# Altium PCB IMU_EEPROM.PcbDoc
Units mm, origin at the board's own origin, x right, y up, seen from the top; angles counter-clockwise.
Board outline 95 x 95 mm, 2 copper layers (Top Layer, Bottom Layer); 22 components, 15 nets, 70 pads, 31 vias.
Unrouted connection lines stored in the file: 41.
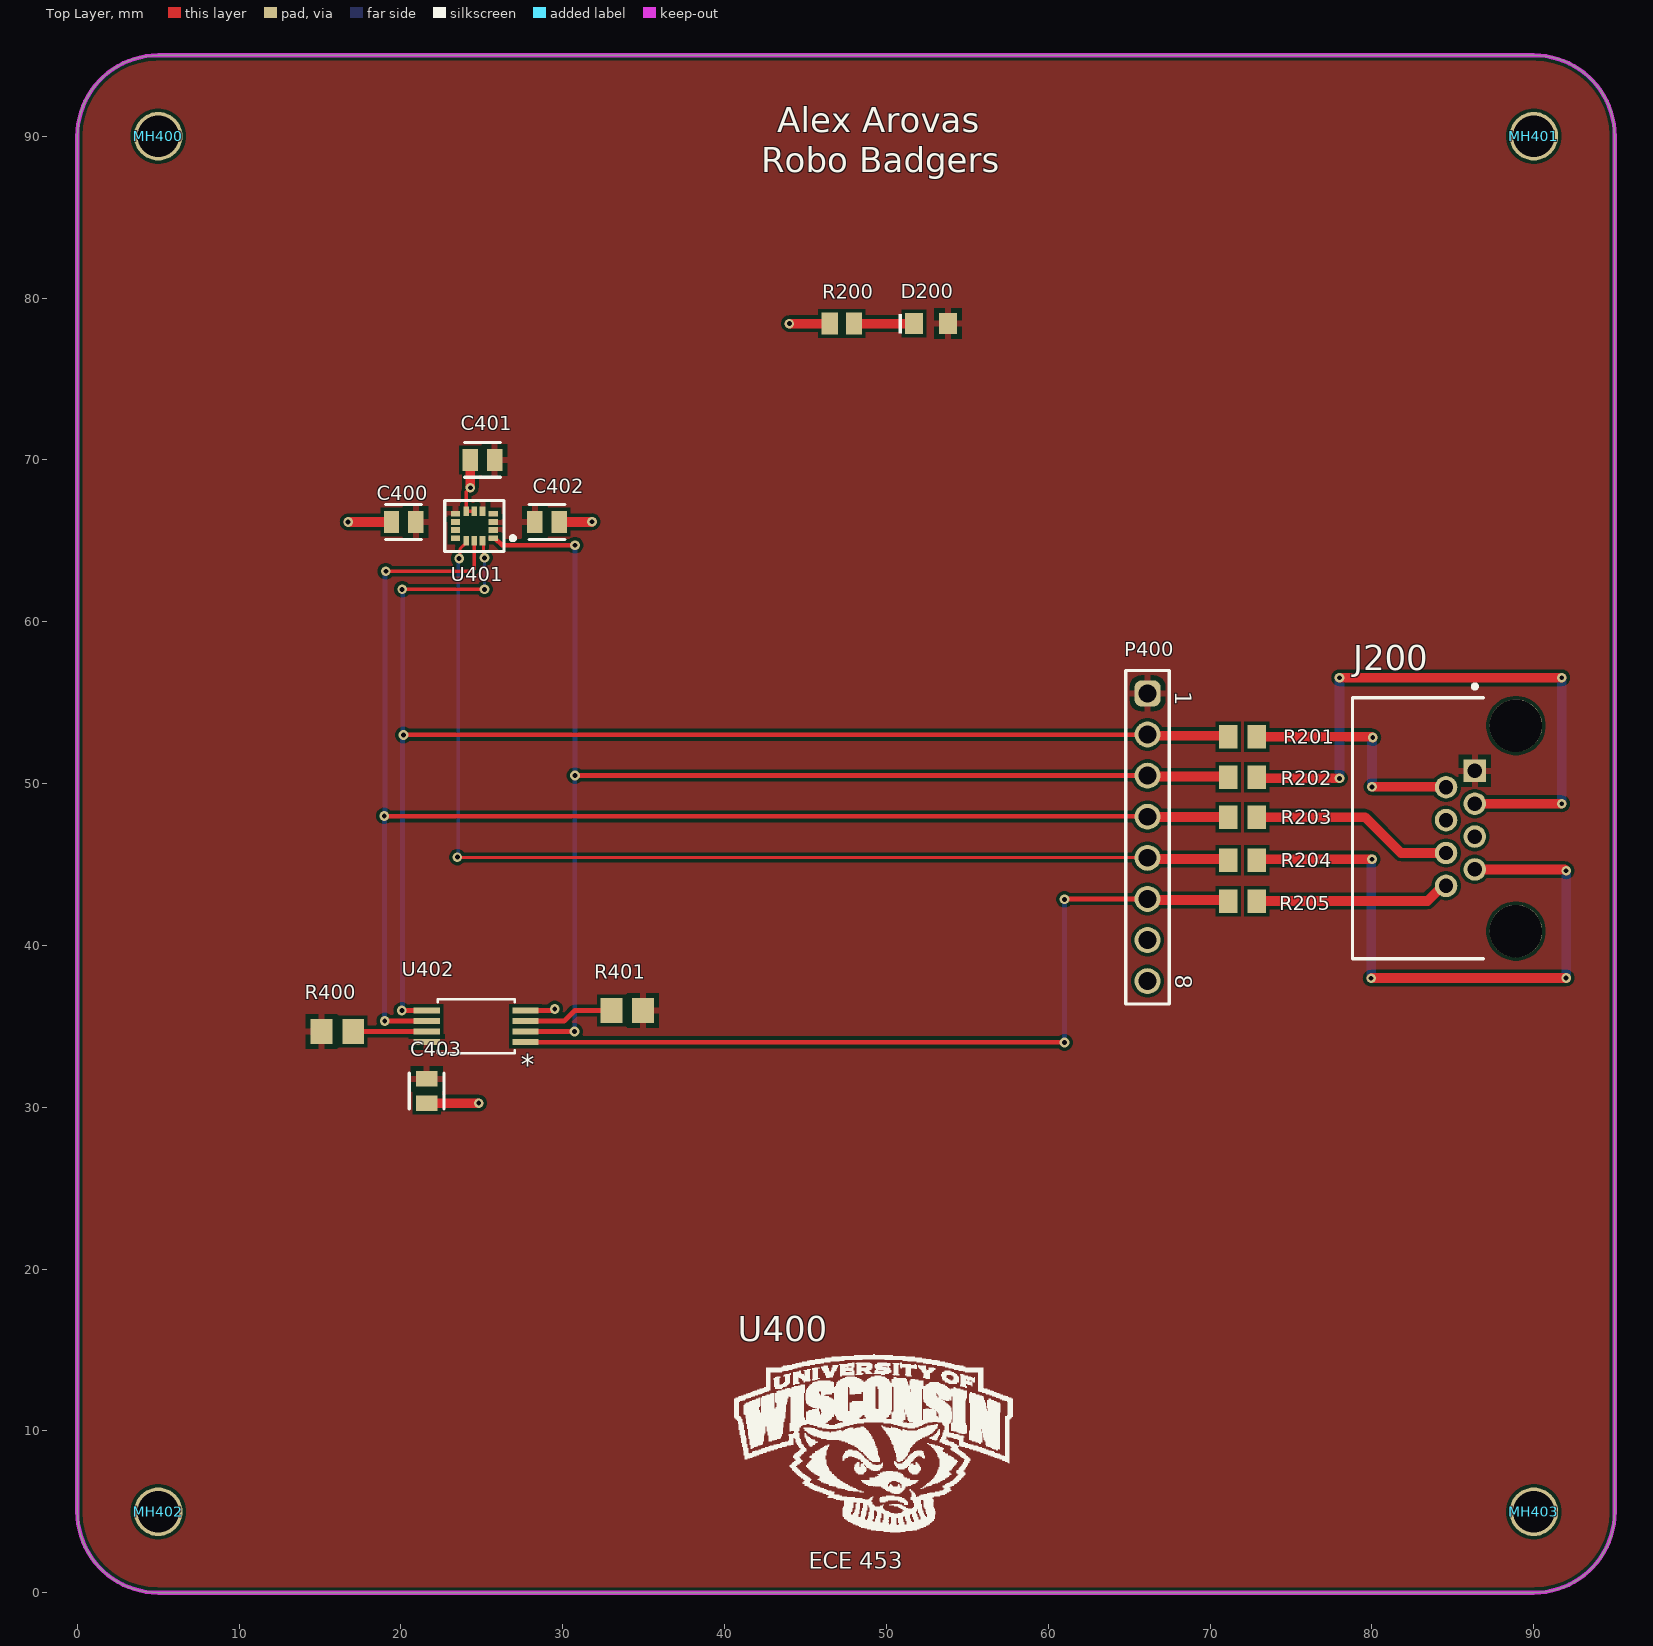
[diagram p0: Top Layer view]
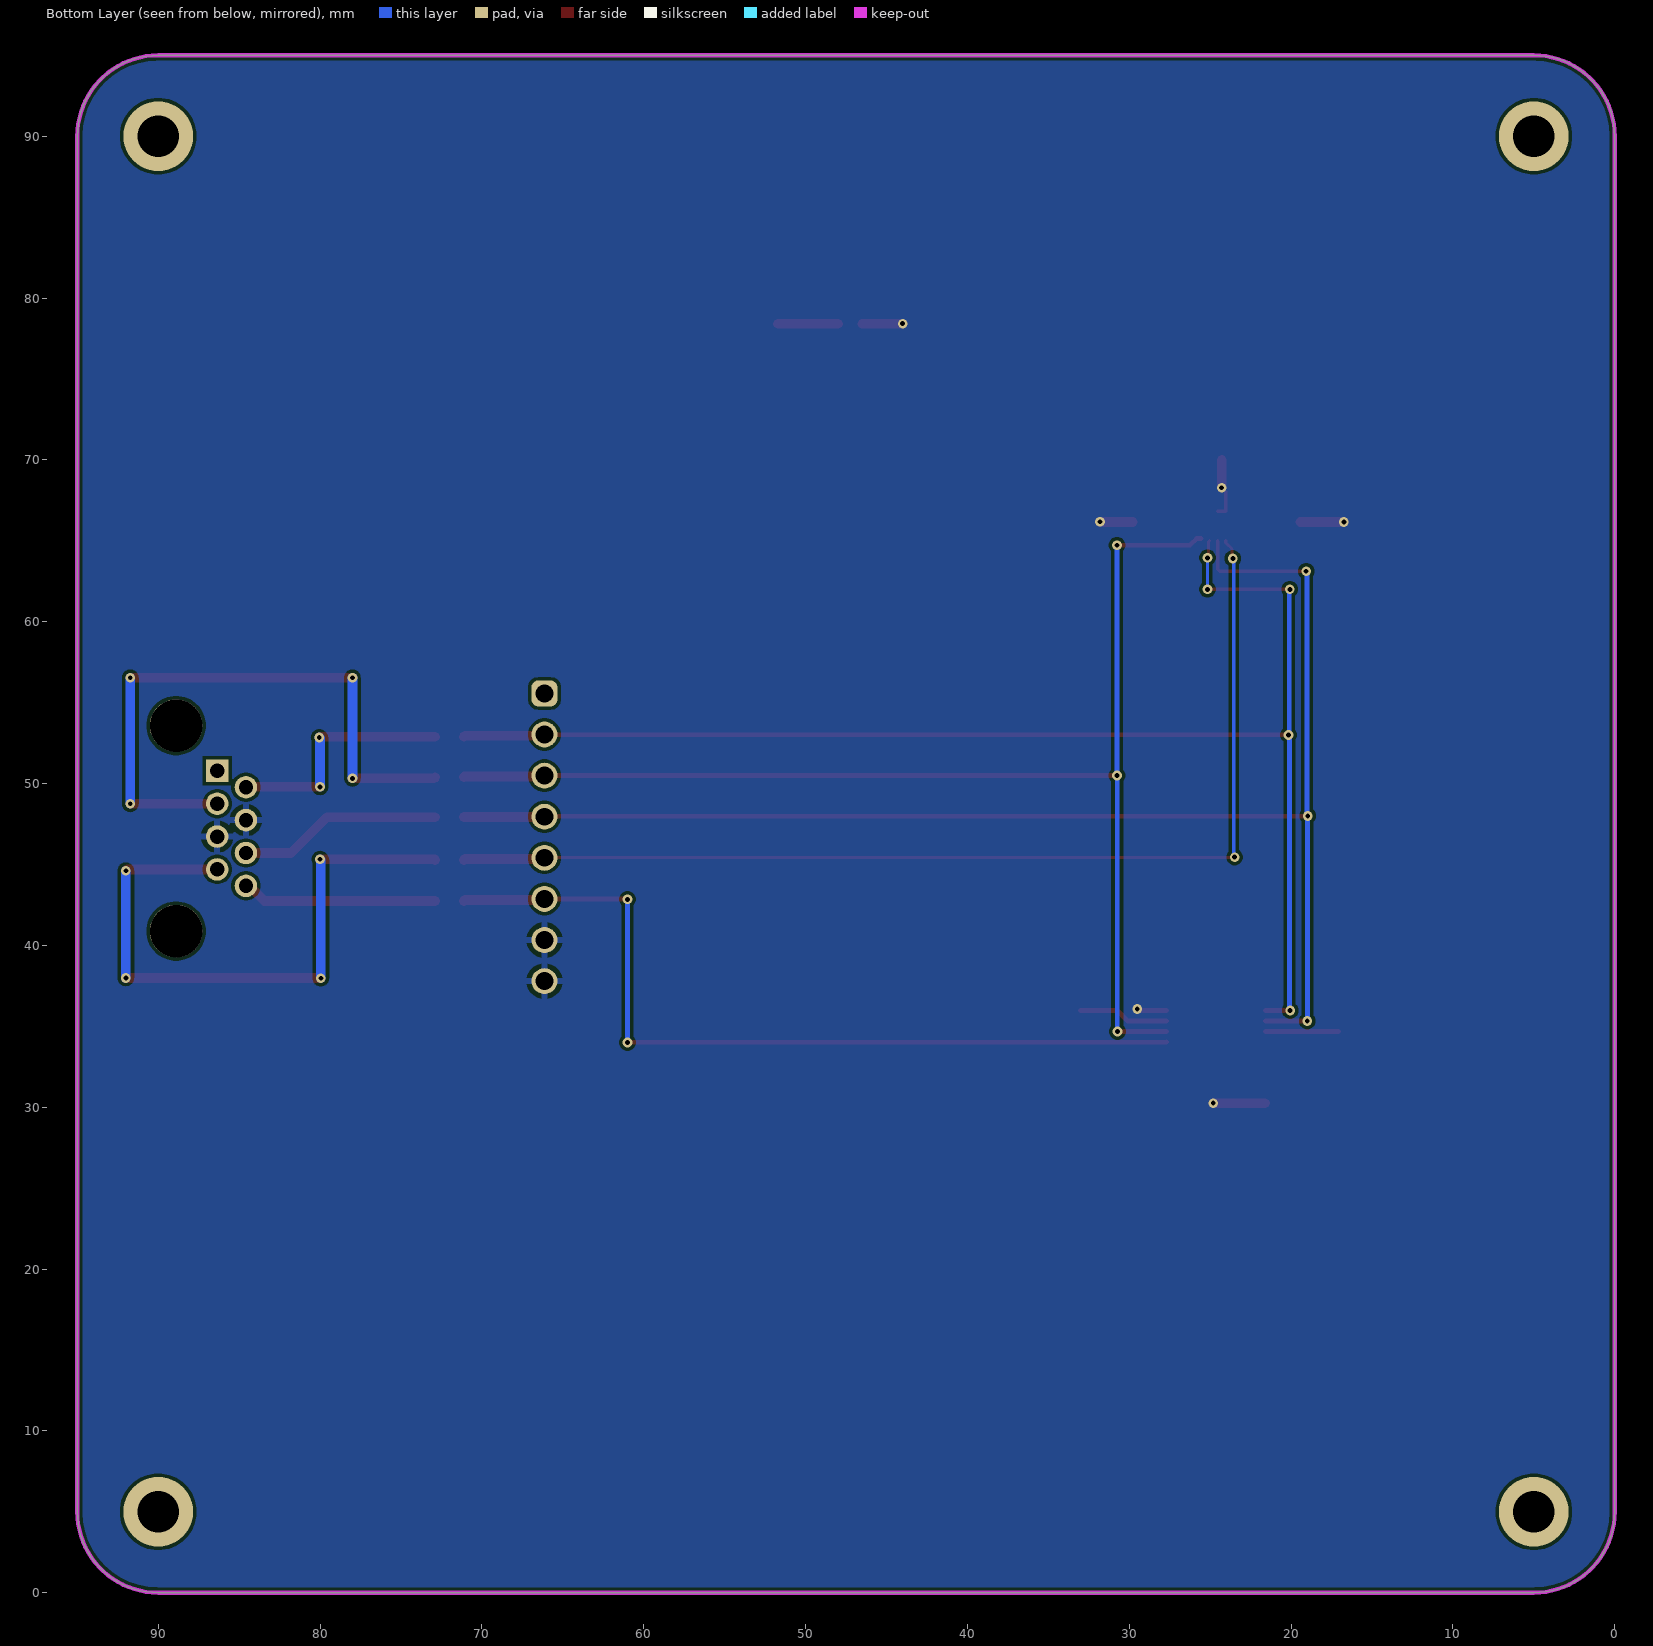
[diagram p1: Bottom Layer view, seen from below]
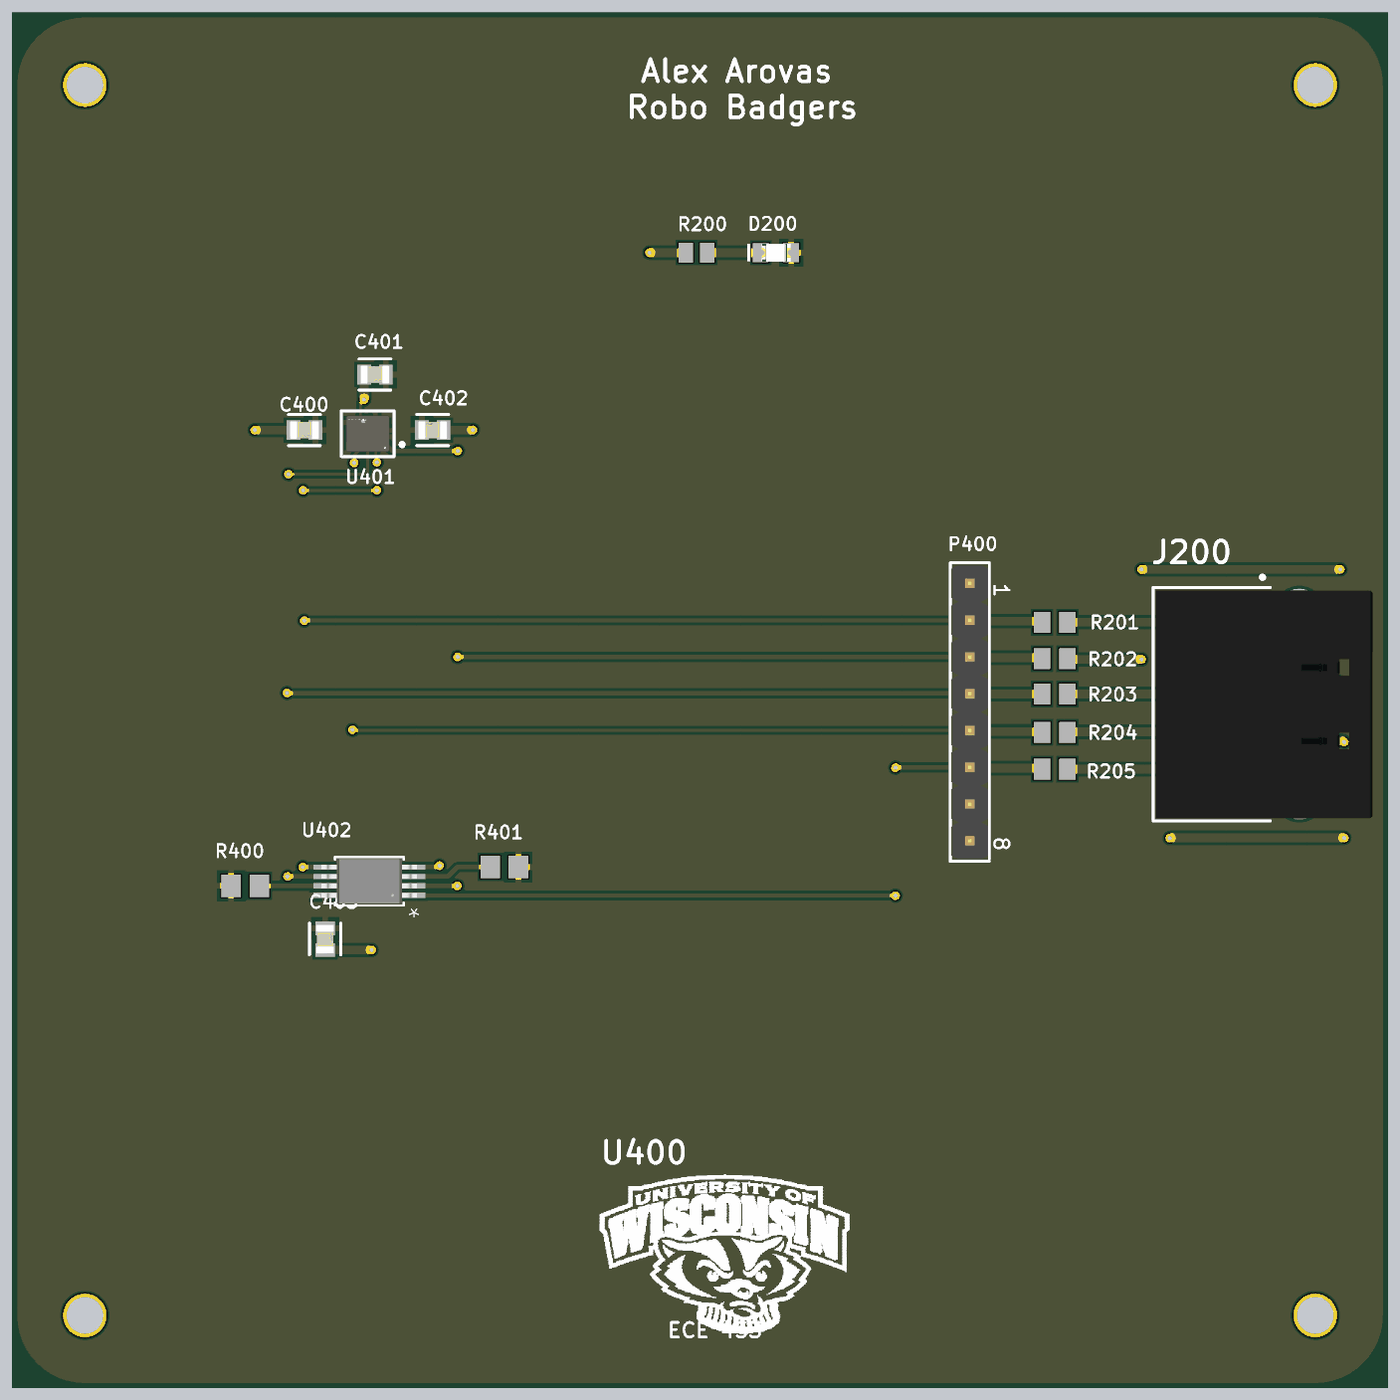
[diagram p2: 3D render of the assembled board from above, using the file's embedded part models]

## Layer stack, top to bottom
Top Solder: solder mask 0.0102, Solder Resist, Dk 3.5
Top Layer: signal copper 0.0356
Dielectric1: dielectric 0.32, FR-4, Dk 4.8
Bottom Layer: signal copper 0.0356
Bottom Solder: solder mask 0.0102, Solder Resist, Dk 3.5

## Board outline
0,5 ccw(c5,5) 5,0 90,0 ccw(c90,5) 95,5 95,90 ccw(c90,90) 90,95 5,95 ccw(c5,90) 0,90

## Design rules (kind name [scope] priority, off if disabled: settings)
Clearance Polygon_Clearance [All vs InPolygon] p1: gap=0.2 ignorepadtopadclearanceinfootprint=FALSE
Clearance [All] p2: gap=0.2 ignorepadtopadclearanceinfootprint=TRUE
ComponentClearance [InComponent('U3')] p1: gap=0 collisioncheckmode=3 verticalgap=0.254 showdistances=FALSE
Height [All] p1: minheight=0 maxheight=75 prefheight=12.7
HoleSize [All] p1: absolutevalues=TRUE maxlimit=6.35 minlimit=0.3 maxpercent=80.000 minpercent=20.000
MinimumAnnularRing [All] p1: minimumring=0.15
MinimumSolderMaskSliver [All] p1: minsoldermaskwidth=0.22
NetAntennae NetAntennae_5.0V [InNet('5.0V')] p1: netantennaetolerance=0
NetAntennae NetAntennae_3.3V [InNet('3.3V')] p2: netantennaetolerance=0
PlaneClearance [All] p1: clearance=0.3
PlaneConnect [All] p1: planeconnectstyle=Relief reliefexpansion=0.3 reliefentries=4 reliefconductorwidth=0.3 reliefairgap=0.3
PolygonConnect ViaConnect [All vs IsVia] p1: connectstyle=Direct reliefconductorwidth=0.381 reliefentries=4 polygonreliefangle="90 Angle" airgapwidth=0.254
PolygonConnect [All] p2: connectstyle=Relief reliefconductorwidth=0.4 reliefentries=4 polygonreliefangle="90 Angle" airgapwidth=0.3
RoutingVias [All] p1: holewidth=0.3 width=0.6 viastyle="Through Hole" minholewidth=0.3 minwidth=0.6 maxholewidth=5 maxwidth=10
SilkToSilkClearance [All] p1: silktosilkclearance=0
SilkToSolderMaskClearance [IsPad] p1: minsilkscreentomaskgap=0 clearancetoexposedcopper=TRUE
SolderMaskExpansion [All] p1: expansion=0.102 istentingtop=FALSE
UnConnectedPin [All] p1:
Width [All] p1: maxlimit=10 minlimit=0.2 preferedwidth=0.6
21 further rules are at their usual default settings.

## Classes and differential pairs
component class 04_Mechanical: C400 C401 C402 C403 MH400 MH401 MH402 MH403 P400 R400 R401 U1 U400 U401 U402

## Components (designator, comment, footprint, x,y, rotation, side; value= is the part's Value field where it differs from the comment)
C400 "0.10 μF" FP-C0805C-DN-MFG 20.165,66.162 r180 top
C401 "0.10 μF" FP-C0805C-DN-MFG 25.037,70 r180 top
C402 "0.10 μF" FP-C0805C-DN-MFG 29.025,66.162 r0 top
C403 "0.10 μF" FP-C0805C-DN-MFG 21.593,31 r270 top
D200 "150080GS75000" WL-SMCW_0805_150080xx75000 52.75,78.42 r0 top
J200 "RJHSE-5080" FP-RJHSE-5080-MFG 86.482,47.232 r90 top
MH400 "MHOLE_2_55MM" MHOLE_2_55MM 5,90 r0 top
MH401 "MHOLE_2_55MM" MHOLE_2_55MM 90,90 r0 top
MH402 "MHOLE_2_55MM" MHOLE_2_55MM 5,5 r0 top locked
MH403 "MHOLE_2_55MM" MHOLE_2_55MM 90,5 r0 top
P400 "61300811121" 61300811121 66.132,46.681 r270 top
R200 "330R" RESC2013X60X40LL20T25 47.25,78.42 r180 top
R201 "0R" RESC2013X70X40NL20T20 72,52.892 r180 top
R202 "0R" RESC2013X70X40NL20T20 72,50.382 r180 top
R203 "0R" RESC2013X70X40NL20T20 72,47.922 r180 top
R204 "0R" RESC2013X70X40NL20T20 72,45.272 r180 top
R205 "0R" RESC2013X70X40NL20T20 72,42.739 r180 top
R400 "10kR" RESC2013X70X40ML20T20 16.075,34.675 r180 top
R401 "10kR" RESC2013X70X40ML20T20 33.975,35.975 r0 top
U400 "Bucky" WalkingBucky 48,2 r0 top
U401 "LSM6DSMTR" FP-LGA-14L-DM00249496-MFG 24.537,65.912 r180 top
U402 "M95512-DWDW4TP/K" TSSOP8_169MILS_DW_STM-M 24.647,35 r180 top

## Footprints (in the part's own frame and the unit in brackets; to place one, negate y for a bottom-side part, rotate by r counter-clockwise, add the part's x,y. Pads: shape width x height; smd on the part's side, far side on the other; paste and mask are expansions set on the pad)
61300811121 [mm] "Pin Header, pitch 2.54 mm, THT, Vertical, single row, 8p"
  rrect50% 1.6x1.6 hole 1.1: 1(-8.89,0)
  round 1.6 hole 1.1: 2(-6.35,0) 3(-3.81,0) 4(-1.27,0) 5(1.27,0) 6(3.81,0) 7(6.35,0) 8(8.89,0)
  silkscreen extent -10.31,-1.35 10.31,1.35, body extent -10.16,-1.27 10.16,1.27, height 8.57
FP-C0805C-DN-MFG [mm]
  rect 0.95x1.35 smd paste+0 mask+0: 1(-0.75,0) 2(0.75,0)
  silkscreen extent -1.1,-1.07 1.1,1.07, body extent -1.4,-0.85 1.4,0.85, height 0.25
FP-LGA-14L-DM00249496-MFG [mm]
  rect 0.575x0.35 smd paste+0 mask+0: 1(-1.162,0.75) 2(-1.162,0.25) 3(-1.162,-0.25) 4(-1.162,-0.75) 8(1.162,-0.75) 9(1.162,-0.25) 10(1.162,0.25) 11(1.162,0.75)
  rect 0.35x0.575 smd paste+0 mask+0: 5(-0.5,-0.913) 6(0,-0.913) 7(0.5,-0.913) 12(0.5,0.913) 13(0,0.913) 14(-0.5,0.913)
  silkscreen extent -2.5,-1.58 1.83,1.58, body extent -2.05,-1.8 2.05,1.8, height 0.25
FP-RJHSE-5080-MFG [mm]
  rect 1.39x1.39 hole 0.89 paste-1000 mask+0: 1(3.556,0.127)
  round 1.39 hole 0.89 paste-1000 mask+0: 2(2.54,1.905) 3(1.524,0.127) 4(0.508,1.905) 5(-0.508,0.127) 6(-1.524,1.905) 7(-2.54,0.127) 8(-3.556,1.905)
  round 3.25 hole 3.25 unplated paste-1000 mask+0: ""(-6.35,-2.413) ""(6.35,-2.413)
  silkscreen extent -8.06,-0.41 8.89,7.68, body extent -8.16,-7.78 8.16,7.78, height 0.25
MHOLE_2_55MM [mm]
  round 3 / inner round 4.572 / far side round 4.318 hole 2.55: 1(0,0)
RESC2013X60X40LL20T25 [mm] "Chip Resistor, 2-Leads, Body 2.00x1.25mm, IPC High Density"
  rect 1x1.35 smd: 1(-0.75,0) 2(0.75,0)
  body extent -1.1,-0.72 1.1,0.72, height 0.6
RESC2013X70X40ML20T20 [mm] "Chip Resistor, 2-Leads, Body 2.00x1.25mm, IPC Low Density"
  rect 1.35x1.55 smd: 1(-0.975,0) 2(0.975,0)
  body extent -1.1,-0.72 1.1,0.72, height 0.7
RESC2013X70X40NL20T20 [mm] "Chip Resistor, 2-Leads, Body 2.00x1.25mm, IPC Medium Density"
  rect 1.15x1.45 smd: 1(-0.875,0) 2(0.875,0)
  body extent -1.1,-0.72 1.1,0.72, height 0.7
TSSOP8_169MILS_DW_STM-M [mil]
  rect 63.5x14 smd paste+0 mask+0: 1(-120.25,38.39) 2(-120.25,12.8) 3(-120.25,-12.8) 4(-120.25,-38.39) 5(120.25,-38.39) 6(120.25,-12.8) 7(120.25,12.8) 8(120.25,38.39)
  silkscreen extent -94,-66 94,66, body extent -130,-61 130,61, height 47
WalkingBucky [mm]
  silkscreen extent -7.42,1.75 9.8,12.73
WL-SMCW_0805_150080xx75000 [mm] "SMD Mono-color Chip LED, body 2.0x1.25mm"
  rect 1.1x1.3 smd: 1(-1.05,0) 2(1.05,0)
  silkscreen extent -2,-0.6 -1.8,0.6, body extent -1,-0.63 1,0.62, height 0.7

## Part data
C400 C401 C402 C403: library part CMP-2007-00279-2, "CAP CER 0.1UF 50V X7R 0805", Case Code (Imperial)=0805, Case Code (Metric)=2012, Dielectric=X7R, Manufacturer=KEMET, Manufacturer Part Number=C0805C104K5RACTU, Max Operating Temperature=125°C, Min Operating Temperature=-55°C, Package=C0805C-DN, Package Quantity=4000, Supplier Part Number=399-C0805C104K5RAC7800CT-ND, Temperature="-55°C to +125°C", Temperature Coefficient=30ppm/°C, Temperature Range High=+125°C, Tolerance=0.1, Voltage=500V, Voltage Rating="50 V", Voltage Rating (DC)=50V, Automotive=No, Capacitance="0.10 μF", Case/Package=0805, Category=Cap, ComponentLink1Description=https://datasheet.ciiva.com/32431/slceramic-chip-condensers-e-32431755.pdf?src-supplier=Distrelec, ComponentLink1URL=https://datasheet.ciiva.com/32431/slceramic-chip-condensers-e-32431755.pdf?src-supplier=Distrelec, ComponentLink2Description=Datasheet, ComponentLink2URL=https://content.kemet.com/datasheets/KEM_C1003_C0G_SMD.pdf, ComponentLink3Description=https://datasheet.ciiva.com/28682/1851736-28682232.pdf?src-supplier=Element14, ComponentLink3URL=https://datasheet.ciiva.com/28682/1851736-28682232.pdf?src-supplier=Element14, ComponentLink4Description=https://datasheet.ciiva.com/18410/70095383-18410815.pdf?src-supplier=Allied+Electronics, ComponentLink4URL=https://datasheet.ciiva.com/18410/70095383-18410815.pdf?src-supplier=Allied+Electronics, ComponentLink5Description=https://datasheet.ciiva.com/14589/70095383-14589048.pdf?src-supplier=Allied+Electronics, ComponentLink5URL=https://datasheet.ciiva.com/14589/70095383-14589048.pdf?src-supplier=Allied+Electronics, Construction=Flat, Depth=1.25mm, Device Class L1="Passive Components", Device Class L2=Capacitors, Device Class L3="Ceramic Capacitors", Digikey Description="CAP CER 0.1UF 50V X7R 0805", Height=0.88mm, Ipc Land Pattern Name=CAPC200125X78, Lead Free=Yes, Lead Pitch=0.75mm, Length=2mm, Material=Ceramic, Mounting Technology="Surface Mount,PCB", Mouser Description="Cap Ceramic 0.1uF 50V X7R 10% SMD 2.0 x 1.2 mm 125 C Paper T/R", Octopart=https://octopart.com/c0805c104k5ractu-kemet-143926, Packaging="Tape and Reel", Pins=2, Pricing="1=0.14, 10=0.091, 50=0.0546, 100=0.043, 500=0.03172, 1000=0.02627 (USD)", Radiation Hardening=No, Reach SVHC Compliant=No, RoHS=TRUE, RoHS Compliant=Yes, Series="SMD Comm X7R", Stock=1813524, Supplier=Digikey, Temperature Characteristic=X7R, Temperature Range Low=-55°C, Termination=SMD/SMT, Width=1.2mm
D200: library part CMP-1426-00007-2, Case Code (Imperial)=0805, Case Code (Metric)=2012, Color=Green, Forward Current=100mA, Forward Voltage=3.2V, Lens Color=Colorless, Manufacturer="Wurth Electronics", Max Junction Temperature (Tj)=95°C, Max Operating Temperature=85°C, Max Reverse Voltage (DC)=5V, Min Operating Temperature=-40°C, Package Quantity=1, Power Dissipation=105mW, Supplier Part Number=732-4983-1-ND, Test Current=20mA, Case/Package=0805, Category=LEDs, ComponentLink1Description=https://datasheet.ciiva.com/29563/150080gs75000-29563008.pdf?src-supplier=Digikey, ComponentLink1URL=https://datasheet.ciiva.com/29563/150080gs75000-29563008.pdf?src-supplier=Digikey, ComponentLink2Description=https://datasheet.ciiva.com/29279/759434-da-01-en-chipled-0805-w-kl-gruen-150080gs75000-29279039.pdf?src-supplier=Conrad, ComponentLink2URL=https://datasheet.ciiva.com/29279/759434-da-01-en-chipled-0805-w-kl-gruen-150080gs75000-29279039.pdf?src-supplier=Conrad, Dominant Wavelength=525nm, Height=700µm, Length=2mm, Lens Size=1.25mm, Lens Style="Clear, Rectangular", Lens Transparency=Clear, Luminous Intensity=450mcd, Manufacturer Part Number=150080GS75000, Mount="Surface Mount", Mounting Technology="Surface Mount", NexarPartId=29717780, Packaging="Tape and Reel", Peak Wavelength=515nm, Pricing="1=0.19, 50=0.176, 100=0.151, 500=0.131 (USD)", REACH SVHC=Unknown, Reach SVHC Compliant=Unknown, Reverse Voltage=5V, RoHS=Compliant, RoHS Compliant=Yes, Series=WL-SMCW, Stock=29733, Supplier=Digikey, Viewing Angle=140°, Wavelength=520nm, Width=1.25mm
J200: library part CMP-02366-000003-1, "CONN MOD JACK 8P8C R/A UNSHLD", Contact Resistance=20mR, Current Rating=1.5A, Manufacturer=Amphenol, Max Voltage Rating (AC)=125V, Package=CONN_MOD_JACK, Supplier Part Number=RJHSE-5080-ND, Temperature="-55°C to +85°C", Temperature Range High=+85°C, Temperature Range Low=-55°C, Automotive=No, Category=Conn, ComponentLink1Description=https://datasheet.ciiva.com/7629/1682821-7629402.pdf?src-supplier=Element14, ComponentLink1URL=https://datasheet.ciiva.com/7629/1682821-7629402.pdf?src-supplier=Element14, ComponentLink2Description=Datasheet, ComponentLink2URL=https://cdn.amphenol-icc.com/media/wysiwyg/files/documentation/datasheet/inputoutput/io-modjack-rjhse.pdf, ComponentLink3Description=https://datasheet.ciiva.com/1432/1693748-1432448.pdf?src-supplier=Element14, ComponentLink3URL=https://datasheet.ciiva.com/1432/1693748-1432448.pdf?src-supplier=Element14, Conn Gender=Female, Conn Orientation="Right Angle", Connector Type=RJ45, Contact Material=Gold,Nickel, Contact Plating=Gold, Depth=14.99mm, Device Class L1=Connectors, Device Class L2="Modular / Ethernet Connectors", Device Class L3=unset, Digikey Description="CONN MOD JACK 8P8C R/A UNSHLD", Footprint Url=https://cdn.amphenol-icc.com/media/wysiwyg/files/drawing/rjhse5080.pdf?__cf_chl_jschl_tk__=e349db0bbbb6188a39347cd5e541b92fa02c9719-1587748343-0-AW7tChdeHzRPLX9gSWj7WrKaXQoY9BsmT9Ek0h-T62M9y3Rs9iypFcOtkzb-6sGYQEjFE-jcoNciDETCOZrh1rYyOesac5SvYLoLwHIsHvF4AKBlx-MXmfZUVk9OTTJLqyQq2qMm0PFRLJpNcK0nrKResqOniRSYixG2sPTmOPraH-ULJFBDL602CHqcI9KKBgTq90Jh1OL2Td4moJ99rFsJRJ1Tk_uoxGe8ublcP_ARu-uLpWcQrBcwOcHDTAwL29DAwVaqcH7ta8Ks7WMlHmVl_pILeEDwT0bE9vu5Pa5S3PtNRF1leuFkgi_FMbUxTDulc5xzbXSfng8srUIV1lWXny5nx1fZJEUa_w97yKjffzBMxiWLWVN-V7-uqAaPbyv_m-wRyw5O25OZNyJOeGU, Gender=Female, Height=0.535inch, Is Female=yes, Lead Free=Yes, Length=15.75mm, Manufacturer Part Number=RJHSE-5080, Max Current Rating=1.5A, Mounting Technology="Through Hole,Panel", Mouser Description="Modular Connectors / Ethernet Connectors R/A RJ45 NONSHIELDED 8 CONT NO LEDS", Number of Contacts=8, Number of Ports=1, Number of Positions=8, Number of Positions Loaded=8, Octopart=https://octopart.com/rjhse-5080-amphenol-45060, Orientation="Right Angle", Packaging=Rail/Tube, Pitch=1.02mm, Pricing="1=1.03, 10=0.867, 25=0.832, 50=0.8142, 100=0.7788, 250=0.708, 500=0.6372, 1000=0.56641, 2500=0.51331 (USD)", Radiation Hardening=No, Reach SVHC Compliant=Unknown, RoHS=TRUE, RoHS Compliant=Yes, Stock=72112, Supplier=Digikey, Termination=Solder, Voltage Rating=125V, Voltage Rating (DC)=125V
MH400 MH401 MH402 MH403: "Mounting Holde", Manufacturer Part Number="UW MTHOLE"
P400: library part CMP-1502-01076-2, Color=Black, Contact Resistance=20mΩ, Current Rating=3A, Manufacturer="Wurth Electronics", Max Operating Temperature=105°C, Min Operating Temperature=-40°C, Operating Supply Voltage=250V, Supplier Part Number=732-5321-ND, Category="Headers and Wire Housings", ComponentLink1Description=https://datasheet.octopart.com/61300811121-W%C3%BCrth-Elektronik-datasheet-21154836.pdf?src-supplier=Element14, ComponentLink1URL=https://datasheet.octopart.com/61300811121-W%C3%BCrth-Elektronik-datasheet-21154836.pdf?src-supplier=Element14, ComponentLink2Description=https://katalog.we-online.de/em/datasheet/6130xx11121.pdf?src-supplier=Digikey, ComponentLink2URL=https://katalog.we-online.de/em/datasheet/6130xx11121.pdf?src-supplier=Digikey, Connector Type="Male Pin", Contact Material=Copper, Contact Mating Length=5.9944mm, Contact Plating=Gold, Contact Type="Male Pin", Gender=Male, Height=8.54mm, Lead Pitch=2.54mm, Manufacturer Part Number=61300811121, Mount="Through Hole", Mounting Technology="Through Hole", NexarPartId=32855533, Number of Contacts=8, Number of Pins=8, Number of Positions=8, Number of Rows=1, Orientation=Vertical, Packaging=Bulk, Pitch=2.54mm, Pricing="1=0.4, 10=0.336, 25=0.28, 50=0.234, 100=0.212, 1000=0.193 (USD)", REACH SVHC=Unknown, Reach SVHC Compliant=Unknown, RoHS=Compliant, RoHS Compliant=Yes, Series=WR-PHD, Stock=13018, Supplier=Digikey, Termination=Solder, Voltage Rating=250V
R200: library part CMP-2001-00628-1, Case/Package=0805, Manufacturer=Panasonic, Manufacturer Part Number=ERA-6AEB331V, Max Operating Temperature=155°C, Min Operating Temperature=-55°C, Package Height=0.5mm, Package Length=2mm, Package Style=SMTMeter, Package Width=1.25mm, Part Number=ERA6AEB331V, Power=125mW, Rated Temperature=85°C, Resistor Type="FIXED RESISTOR", Supplier Part Number=P330DACT-ND, Temperature Coefficient=25ppm/°C, Tolerance=0.1%, Working Voltage=100V, Category="Chip SMD Resistors", ComponentLink1Description=https://datasheet.ciiva.com:443/pdfs/VipMasterIC/IC/PANA/PANA-S-A0009459258/PANA-S-A0009459258-1.pdf?src-supplier=IHS+Markit, ComponentLink1URL=https://datasheet.ciiva.com:443/pdfs/VipMasterIC/IC/PANA/PANA-S-A0009459258/PANA-S-A0009459258-1.pdf?src-supplier=IHS+Markit, ComponentLink2Description=https://datasheet.ciiva.com/11808/0900766b80eb1d8c-11808093.pdf?src-supplier=Rs, ComponentLink2URL=https://datasheet.ciiva.com/11808/0900766b80eb1d8c-11808093.pdf?src-supplier=Rs, ComponentLink3Description=https://datasheet.ciiva.com/29184/452857-da-01-en-widerstand-0805-era-29184079.pdf?src-supplier=Conrad, ComponentLink3URL=https://datasheet.ciiva.com/29184/452857-da-01-en-widerstand-0805-era-29184079.pdf?src-supplier=Conrad, ComponentLink4Description=https://datasheet.ciiva.com/30237/54aoa0000ce26-30237450.pdf?src-supplier=Onlinecomponents.com, ComponentLink4URL=https://datasheet.ciiva.com/30237/54aoa0000ce26-30237450.pdf?src-supplier=Onlinecomponents.com, ComponentLink5Description=https://datasheet.ciiva.com/16777/70068849-16777611.pdf?src-supplier=Allied+Electronics, ComponentLink5URL=https://datasheet.ciiva.com/16777/70068849-16777611.pdf?src-supplier=Allied+Electronics, ComponentLink6Description=https://datasheet.ciiva.com/9182/aoa0000ce26-9182968.pdf?src-supplier=Avnet, ComponentLink6URL=https://datasheet.ciiva.com/9182/aoa0000ce26-9182968.pdf?src-supplier=Avnet, ComponentLink7Description=https://datasheet.ciiva.com/48536/era-eng-tds-48536857.pdf?src-supplier=Distrelec, ComponentLink7URL=https://datasheet.ciiva.com/48536/era-eng-tds-48536857.pdf?src-supplier=Distrelec, ComponentLink8Description=https://datasheet.ciiva.com/22744/1776116-22744153.pdf?src-supplier=Element14, ComponentLink8URL=https://datasheet.ciiva.com/22744/1776116-22744153.pdf?src-supplier=Element14, ComponentLink9Description=https://datasheet.ciiva.com/46436/485442-46436606.pdf?src-supplier=Element14, ComponentLink9URL=https://datasheet.ciiva.com/46436/485442-46436606.pdf?src-supplier=Element14, ComponentLink10Description=https://datasheet.ciiva.com/6138/485442-6138585.pdf?src-supplier=Farnell, ComponentLink10URL=https://datasheet.ciiva.com/6138/485442-6138585.pdf?src-supplier=Farnell, ComponentLink11Description=https://datasheet.ciiva.com/6138/485442-6138589.pdf?src-supplier=Farnell, ComponentLink11URL=https://datasheet.ciiva.com/6138/485442-6138589.pdf?src-supplier=Farnell, ComponentLink12Description=https://datasheet.ciiva.com/22759/485442-22759176.pdf?src-supplier=Farnell, ComponentLink12URL=https://datasheet.ciiva.com/22759/485442-22759176.pdf?src-supplier=Farnell, ComponentLink13Description=https://datasheet.ciiva.com/43457/485442-43457816.pdf?src-supplier=Farnell, ComponentLink13URL=https://datasheet.ciiva.com/43457/485442-43457816.pdf?src-supplier=Farnell, ComponentLink14Description=https://datasheet.ciiva.com/24164/aoa0000ce26-197354-24164407.pdf?src-supplier=Mouser, ComponentLink14URL=https://datasheet.ciiva.com/24164/aoa0000ce26-197354-24164407.pdf?src-supplier=Mouser, Construction=Rectangular, JESD-609 Code=e3, Mounting Technology="Surface Mount", Packaging="Tape and Reel", Pins=2, Pricing="1=0.13, 10=0.095, 50=0.0748, 100=0.067, 500=0.05106, 1000=0.04511 (USD)", Reach SVHC Compliant=Yes, Reference Standard=AEC-Q200, RoHS=Yes, RoHS Compliant=Yes, Stock=18932, Supplier=Digikey, Technology="THIN FILM", Terminal Finish=Nickel, Termination=Wraparound
R201 R202 R203 R204 R205: library part CMP-1665-00002-5, "Chip Resistor, 0 Ohm, +/- 1%, 0.125 W, -55 to 155 degC, 0805 (2012 Metric), RoHS, Tape and Reel", Case Code (Imperial)=0805, Case Code (Metric)=2012, Manufacturer=Panasonic, Manufacturer Part Number=ERJ-6GEY0R00V, Max Operating Temperature="155 degC", Min Operating Temperature="-55 degC", Package Height=0.6mm, Package Length=2mm, Package Quantity=5000, Package Shape=Rectangular, Package Style=SMTMeter, Package Width=1.25mm, Power=125mW, Rated Temperature=70°C, Resistance="0 Ohm", Resistor Type="FIXED RESISTOR", Supplier Part Number=P0.0ACT-ND, Tolerance=5%, Case/Package=0805, Category="Chip SMD Resistors", ComponentLink1Description="Manufacturer URL", ComponentLink1URL=http://www.panasonic.com/, ComponentLink2Description=Datasheet, ComponentLink2URL=http://industrial.panasonic.com/cdbs/www-data/pdf/RDA0000/AOA0000C84.pdf, ComponentLink3Description=https://datasheet.ciiva.com:443/pdfs/VipMasterIC/IC/PANA/PANA-S-A0009459603/PANA-S-A0009459603-1.pdf?src-supplier=IHS+Markit, ComponentLink3URL=https://datasheet.ciiva.com:443/pdfs/VipMasterIC/IC/PANA/PANA-S-A0009459603/PANA-S-A0009459603-1.pdf?src-supplier=IHS+Markit, ComponentLink4Description=https://datasheet.ciiva.com/36526/1989607-36526237.pdf?src-supplier=Jameco, ComponentLink4URL=https://datasheet.ciiva.com/36526/1989607-36526237.pdf?src-supplier=Jameco, ComponentLink5Description=https://datasheet.ciiva.com/11821/0900766b80f806dd-11821735.pdf?src-supplier=Rs, ComponentLink5URL=https://datasheet.ciiva.com/11821/0900766b80f806dd-11821735.pdf?src-supplier=Rs, ComponentLink6Description=https://datasheet.ciiva.com/43460/1678796-43460073.pdf?src-supplier=Farnell, ComponentLink6URL=https://datasheet.ciiva.com/43460/1678796-43460073.pdf?src-supplier=Farnell, ComponentLink7Description=https://datasheet.ciiva.com/46377/1678796-46377866.pdf?src-supplier=Element14, ComponentLink7URL=https://datasheet.ciiva.com/46377/1678796-46377866.pdf?src-supplier=Element14, ComponentLink8Description=https://datasheet.ciiva.com/28695/1678796-28695877.pdf?src-supplier=Element14, ComponentLink8URL=https://datasheet.ciiva.com/28695/1678796-28695877.pdf?src-supplier=Element14, ComponentLink9Description=https://datasheet.ciiva.com/9117/aoa0000ce1-9117354.pdf?src-supplier=Avnet, ComponentLink9URL=https://datasheet.ciiva.com/9117/aoa0000ce1-9117354.pdf?src-supplier=Avnet, Construction=Rectangular, DatasheetVersion=03/2015, Height="0.6 mm", JESD-609 Code=e3, Length="2 mm", Mounting Technology="Surface Mount", PackageDescription="2-Pin Surface Mount Device, Body 2 x 1.25 mm", Packaging="Tape and Reel", PartNumber=ERJ-6GEY0R00V, Pins=2, Pricing="1=0.1, 10=0.057, 25=0.0432, 50=0.033, 100=0.0231, 250=0.01856, 500=0.01484, 1000=0.01092 (USD)", Radiation Hardening=No, REACH SVHC="No SVHC", Reach SVHC Compliant=Yes, Reference Standard=AEC-Q200, RoHS=Yes, RoHS Compliant=Yes, RoHSCompliant=True, Stock=179566, Supplier=Digikey, Technology="METAL GLAZE/THICK FILM", Terminal Finish=Nickel, Termination=Wraparound, Width="1.25 mm"
R400 R401: library part CMP-2001-04376-1, Case/Package=0805, Manufacturer=Panasonic, Manufacturer Part Number=ERJ-6ENF1002V, Max Operating Temperature=155°C, Min Operating Temperature=-55°C, Package Height=0.6mm, Package Length=2mm, Package Shape=Rectangular, Package Style=SMTMeter, Package Width=1.25mm, Power=125mW, Rated Temperature=70°C, Resistor Type="FIXED RESISTOR", Supplier Part Number=P10.0KCCT-ND, Temperature Coefficient=100ppm/°C, Tolerance=1%, Working Voltage=150V, Category="Chip SMD Resistors", ComponentLink1Description=https://datasheet.ciiva.com:443/pdfs/VipMasterIC/IC/PANA/PANA-S-A0009889626/PANA-S-A0009889626-1.pdf?src-supplier=IHS+Markit, ComponentLink1URL=https://datasheet.ciiva.com:443/pdfs/VipMasterIC/IC/PANA/PANA-S-A0009889626/PANA-S-A0009889626-1.pdf?src-supplier=IHS+Markit, ComponentLink2Description=https://datasheet.ciiva.com/11808/0900766b80f80784-11808080.pdf?src-supplier=Rs, ComponentLink2URL=https://datasheet.ciiva.com/11808/0900766b80f80784-11808080.pdf?src-supplier=Rs, ComponentLink3Description=https://datasheet.ciiva.com/7830/426256-7830745.pdf?src-supplier=Element14, ComponentLink3URL=https://datasheet.ciiva.com/7830/426256-7830745.pdf?src-supplier=Element14, ComponentLink4Description=https://datasheet.ciiva.com/27055/1988971-27055733.pdf?src-supplier=Jameco, ComponentLink4URL=https://datasheet.ciiva.com/27055/1988971-27055733.pdf?src-supplier=Jameco, ComponentLink5Description=https://datasheet.ciiva.com/46372/1678782-46372715.pdf?src-supplier=Element14, ComponentLink5URL=https://datasheet.ciiva.com/46372/1678782-46372715.pdf?src-supplier=Element14, ComponentLink6Description=https://datasheet.ciiva.com/46372/1678782-46372714.pdf?src-supplier=Element14, ComponentLink6URL=https://datasheet.ciiva.com/46372/1678782-46372714.pdf?src-supplier=Element14, ComponentLink7Description=https://datasheet.ciiva.com/24070/aoa0000ce2-24070702.pdf?src-supplier=Mouser, ComponentLink7URL=https://datasheet.ciiva.com/24070/aoa0000ce2-24070702.pdf?src-supplier=Mouser, ComponentLink8Description=https://datasheet.ciiva.com/16725/70260748-16725031.pdf?src-supplier=Allied+Electronics, ComponentLink8URL=https://datasheet.ciiva.com/16725/70260748-16725031.pdf?src-supplier=Allied+Electronics, ComponentLink9Description=https://datasheet.ciiva.com/16759/70260748-16759350.pdf?src-supplier=Allied+Electronics, ComponentLink9URL=https://datasheet.ciiva.com/16759/70260748-16759350.pdf?src-supplier=Allied+Electronics, ComponentLink10Description=https://datasheet.ciiva.com/30140/aoa0000ce2-30140236.pdf?src-supplier=Onlinecomponents.com, ComponentLink10URL=https://datasheet.ciiva.com/30140/aoa0000ce2-30140236.pdf?src-supplier=Onlinecomponents.com, Construction=Rectangular, JESD-609 Code=e3, Mounting Technology="Surface Mount", Packaging="Tape and Reel", Part Number=ERJ-6ENF1002V, Pins=2, Pricing="1=0.11, 10=0.053, 50=0.0344, 100=0.0292, 500=0.02058, 1000=0.01792 (USD)", Reach SVHC Compliant=Yes, Reference Standard=AEC-Q200, RoHS=Yes, RoHS Compliant=Yes, Stock=663782, Supplier=Digikey, Technology="METAL GLAZE/THICK FILM", Terminal Finish=Nickel, Termination=Wraparound
U400: "Bucky Badger Image", Manufacturer Part Number="UW Bucky"
U401: library part CMP-12177-000008-1, "IMU ACCEL/GYRO I2C/SPI 14LGA", Case/Package=TSSOP, Clock Frequency=16MHz, Manufacturer=STMicroelectronics, Max Operating Temperature=145°C, Max Supply Voltage=3.6V, Min Operating Temperature=-40°C, Min Supply Voltage=1.62V, Operating Supply Current=0.29-0.65mA, Package=LGA-14L-DM00249496, Programming Voltage=5.5V, Supplier Part Number=497-14459-1-ND, Supply Current=4mA, Temperature="-40°C to +85°C", Temperature Range High=+85°C, Accel Range=2/4/8/16g, Access Time-Max=25ns, Automotive=No, Category=IC, ComponentLink1Description=https://datasheet.ciiva.com/29614/dm00046608-29614432.pdf?src-supplier=Digikey, ComponentLink1URL=https://datasheet.ciiva.com/29614/dm00046608-29614432.pdf?src-supplier=Digikey, ComponentLink2Description=Datasheet, ComponentLink2URL=https://www.st.com/resource/en/datasheet/lsm6dsm.pdf, ComponentLink3Description=https://datasheet.ciiva.com/48501/dm00046608-48501612.pdf?src-supplier=Avnet, ComponentLink3URL=https://datasheet.ciiva.com/48501/dm00046608-48501612.pdf?src-supplier=Avnet, Density=512Kb, Device Class L1=Sensors, Device Class L2="Motion Sensors", Device Class L3="Inertial Measurement Units (IMUs)", Digikey Description="IMU ACCEL/GYRO I2C/SPI 14LGA", Footprint Url=https://www.st.com/content/ccc/resource/technical/document/technical_note/73/17/9c/16/dd/96/4a/01/CD00134799.pdf/files/CD00134799.pdf/jcr:content/translations/en.CD00134799.pdf, Frequency=16MHz, Gyro Range=125/250/500/1000/2000°/s, Height=0.86mm, Interface=SPI,Serial, Lead Free=Yes, Manufacturer Part Number=LSM6DSMTR, Memory Format=EEPROM, Mounting Technology="Surface Mount", Mouser Description="LSM6DSM Series 3.6 V I2C/SPI 3D Accelerometer and 3D Gyroscope - LGA-14", Octopart=https://octopart.com/lsm6dsmtr-stmicroelectronics-66358194, Organization=64KX8, Packaging="Tape and Reel", Pins=8, Pricing="1=2.2, 10=1.974, 25=1.9432, 50=1.938, 100=1.7317, 250=1.6748, 500=1.6687, 1000=1.55386 (USD)", Radiation Hardening=No, Resolution=16bits, RoHS=TRUE, RoHS Compliant=Yes, Sensor Output=I2C,SPI, Sensor Type=Temperature,Accelerometer,Gyroscope, Series=-, Stock=18746, Supplier=Digikey, Temperature Range Low=-40°C, Write Protection=YES
U402: "EEPROM Serial-SPI 512K-bit 64K x 8 3.3V/5V Automotive 8-Pin TSSOP T/R", Case/Package=TSSOP, Frequency=10MHz, Manufacturer 1=STMicroelectronics, Max Frequency=16MHz, Max Operating Temperature=145°C, Max Supply Voltage=5.5V, Min Operating Temperature=-40°C, Min Supply Voltage=2.5V, Nominal Supply Current=4mA, Supplier Part Number 1=497-14459-1-ND, Access Time=25ns, Category=EEPROM, ComponentLink1Description=https://datasheet.ciiva.com/29614/dm00046608-29614432.pdf?src-supplier=Digi-Key, ComponentLink1URL=https://datasheet.ciiva.com/29614/dm00046608-29614432.pdf?src-supplier=Digi-Key, ComponentLink2Description=https://datasheet.ciiva.com/48501/dm00046608-48501612.pdf?src-supplier=Avnet, ComponentLink2URL=https://datasheet.ciiva.com/48501/dm00046608-48501612.pdf?src-supplier=Avnet, Copyright="Copyright (C) 2022 Ultra Librarian. All rights reserved.", Density=512Kb, Interface=SPI,Serial, Manufacturer Part Number 1=M95512-DWDW4TP/K, Manufacturer_Part_Number=M95512-DWDW4TP/K, Memory Type=EEPROM, Mfr_Name=STMicroelectronics, Mount="Surface Mount", Number of Pins=8, Packaging="Tape and Reel", Pricing 1="1=2.30000, 10=2.07100, 25=2.03920, 50=2.03400, 100=1.81740, 250=1.76084 (USD)", Radiation Hardening=No, RefDes=RefDes, RoHS=Yes, RoHS Compliant=Yes, Stock 1=11469, Supplier 1=Digi-Key, Type=DEV

## Via types
v1: diameter 0.6, hole 0.3, Top Layer to Bottom Layer, 31 vias

## Nets (pads, with @x,y where several pads share a name; then routed paths per layer and width w, separated by ;. In a path a pad name is that pad's centre, name@x,y a point inside that pad or via, vN(x,y) a via of type N, cw(c..) or ccw(c..) an arc to the next point about the centre after c; other vN are vias at no path point)
3.3V: C400.1 C401.1 C402.1 C403.1 D200.2 J200.1 P400.1 R400.2 R401.2 U401.2 U401.3 U401.5 U401.8 U402.8
EEPROM_CS: J200.8 R205.1 | length 12.1
  Top Layer w0.6: R205.1 83.426,42.739 84.363,43.676 J200.8
EEPROM_CS_R: P400.6 R205.2 U402.1 | length 52.3
  Top Layer w0.3: U402.1 27.714,34.013 60.987,34.013 v1(61,34) ; v1(61,42.842) 61.014,42.856 66.117,42.856 P400.6
  Top Layer w0.6: P400.6 66.197,42.805 71.059,42.805 R205.2
  Bottom Layer w0.3: v1(61,34) v1(61,42.842)
EEPROM_IO_HOLD: R400.1 U402.7 | length 4.5
  Top Layer w0.3: R400.1 U402.7
EEPROM_IO_WP_N: R401.1 U402.3 | length 5.6
  Top Layer w0.3: U402.3 30.078,35.325 30.728,35.975 R401.1
GND: C400.2 C401.2 C402.2 C403.2 J200.4 J200.5 P400.7 P400.8 R200.2 U401.6 U401.7 U402.4 | length 16
  Top Layer w0.2: v1(24.287,68.277) 24.037,68.027 U401.7 U401.6
  Top Layer w0.3: U402.4 29.319,35.975 29.419,36.074 v1(29.5,36.074)
  Top Layer w0.6: v1(16.735,66.162) C400.2 ; C403.2 v1(24.804,30.251) ; v1(24.287,68.277) C401.2 ; C402.2 31.79,66.162 v1(31.806,66.179) ; v1(44,78.42) R200.2
IMU_CS: J200.7 R204.1 | length 38.9
  Top Layer w0.6: R204.1 72.926,45.323 v1(80,45.323) ; v1(79.951,37.971) 79.97,37.991 v1(92,37.991) ; J200.7 91.918,44.692 v1(92,44.61)
  Bottom Layer w0.6: v1(79.951,37.971) 79.951,45.274 v1(80,45.323) ; v1(92,37.991) v1(92,44.61)
IMU_CS_R: P400.5 R204.2 U401.12 | length 67.5
  Top Layer w0.2: v1(23.487,45.452) 23.508,45.432 66.111,45.432 P400.5 ; v1(23.596,63.901) 23.651,63.955 23.651,64.501 24.037,64.888 U401.12
  Top Layer w0.6: P400.5 66.201,45.341 71.056,45.341 R204.2
  Bottom Layer w0.2: v1(23.487,45.452) 23.542,45.507 23.542,63.846 v1(23.596,63.901)
MISO: J200.3 R202.1 | length 38.2
  Top Layer w0.6: R202.1 72.935,50.322 v1(78,50.322) ; v1(78,56.536) v1(91.727,56.536) ; J200.3 91.721,48.756 v1(91.727,48.751)
  Bottom Layer w0.6: v1(78,50.322) v1(78,56.536) ; v1(91.727,48.751) v1(91.727,56.536)
MISO_R: P400.3 R202.2 U401.1 U402.2 | length 78.9
  Top Layer w0.3: U401.1@25.562,65.138 25.837,65.138 26.25,64.725 v1(30.754,64.725) ; U402.2 v1(30.728,34.675) ; v1(30.754,50.491) P400.3
  Top Layer w0.6: P400.3 66.186,50.436 71.071,50.436 R202.2
  Bottom Layer w0.3: v1(30.728,34.675) 30.741,34.688 30.741,50.478 v1(30.754,50.491) v1(30.754,64.725)
MOSI: J200.2 R201.1 | length 14.9
  Top Layer w0.6: R201.1 80,52.892 v1(80.049,52.843) ; v1(80,49.793) 84.556,49.793 J200.2
  Bottom Layer w0.6: v1(80,49.793) 80,52.794 v1(80.049,52.843)
MOSI_R: P400.2 R201.2 U401.14 U402.5 | length 86.8
  Top Layer w0.2: v1(20.075,62) v1(25.168,62) ; U401.14 25.103,64.935 25.103,64.011 v1(25.168,63.946)
  Top Layer w0.3: v1(20.054,35.975) U402.5 ; v1(20.155,53) 20.171,53.015 66.116,53.015 P400.2
  Top Layer w0.6: P400.2 66.201,52.961 71.056,52.961 R201.2
  Bottom Layer w0.2: v1(25.168,62) v1(25.168,63.946)
  Bottom Layer w0.3: v1(20.054,35.975) 20.105,36.026 20.105,52.949 v1(20.155,53) 20.115,53.04 20.115,61.96 v1(20.075,62)
PWR_ON: D200.1 R200.1 | length 3.7
  Top Layer w0.6: R200.1 D200.1
SCLK: J200.6 R203.1 | length 12.6
  Top Layer w0.6: R203.1 79.583,47.922 81.797,45.708 J200.6
SCLK_R: P400.4 R203.2 U401.13 U402.6 | length 89.9
  Top Layer w0.2: v1(19.065,63.117) 24.407,63.117 24.524,63.234 24.524,64.987 U401.13
  Top Layer w0.3: v1(18.966,48) 18.99,47.975 66.107,47.975 P400.4 ; v1(19,35.325) U402.6
  Top Layer w0.6: P400.4 66.146,47.936 71.111,47.936 R203.2
  Bottom Layer w0.3: v1(19,35.325) 18.983,35.342 18.983,47.983 v1(18.966,48) 19.015,48.05 19.015,63.067 v1(19.065,63.117)
pads on no net: J200. MH400.1 MH401.1 MH402.1 MH403.1 U401.4 U401.9 U401.10 U401.11

## Polygon pours and split planes (outlines as drawn)
GND on Bottom Layer "B_GND" (solid, remove dead copper, pour order 1): 95,0 95,95 -1,95 -1,0
3.3V on Top Layer "T_3.3V" (solid, remove dead copper, pour order 4): 95,0 0,0 0,95 95,95

## Keep-outs
Keep-Out Layer:
  the board outline again, w0.254

## Silkscreen, mask and mechanical layers (free items; w line width, h text height)
Top Overlay:
  text "Alex Arovas" at 43.254,90.254 h1.52
  text "Robo Badgers" at 42.254,87.762 h1.52
Mechanical 2:
  lines w0.254: 5,0 cw(c5,5) 0,5 0,90 cw(c5,90) 5,95 90,95 cw(c90,90) 95,90 95,5 cw(c90,5) 90,0 5,0 ; 5,0 5,0

## Dimensions
90,0 to 90,95 on Mechanical 1
0,5 to 95,5 on Mechanical 1

## Text inside footprints (layer, text, board x,y; h text height)
P400: Top Overlay "1" at 67.832,55.691 h1.02 r270; Top Overlay "8" at 67.832,38.171 h1.02 r270
U400: Top Overlay "ECE 453" at 45.206,1.492 h1.02
U402: Top Overlay "*" at 28.273,33.796 h1.27 r180; Mechanical 13 "*" at 26.832,34.797 h1.27 r180